# Altium PCB ESP32SSMB V1.2 .PcbDoc (part 1 of 2)
Units mm, origin at the board's own origin, x right, y up, seen from the top; angles counter-clockwise.
Board outline 38.38 x 27.81 mm, 2 copper layers (Top Layer, Bottom Layer), stack 1.571 mm thick; 72 components, 61 nets, 251 pads, 45 vias.
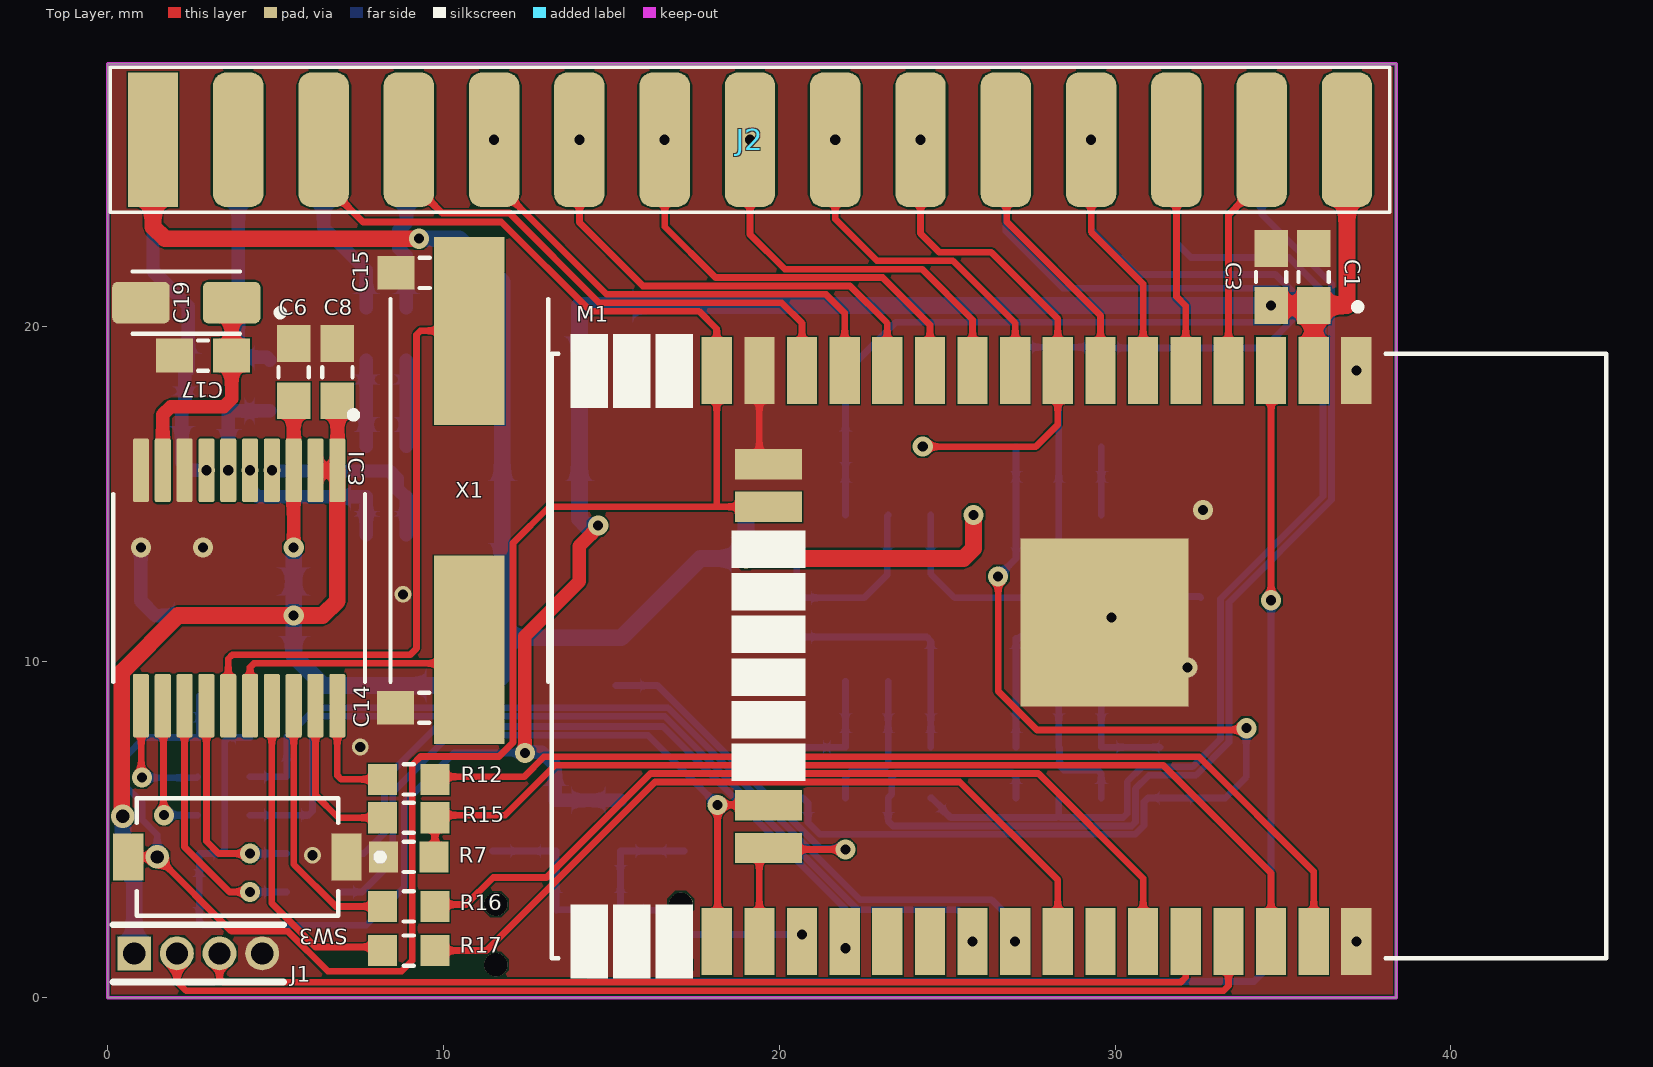
[diagram p0: Top Layer view]
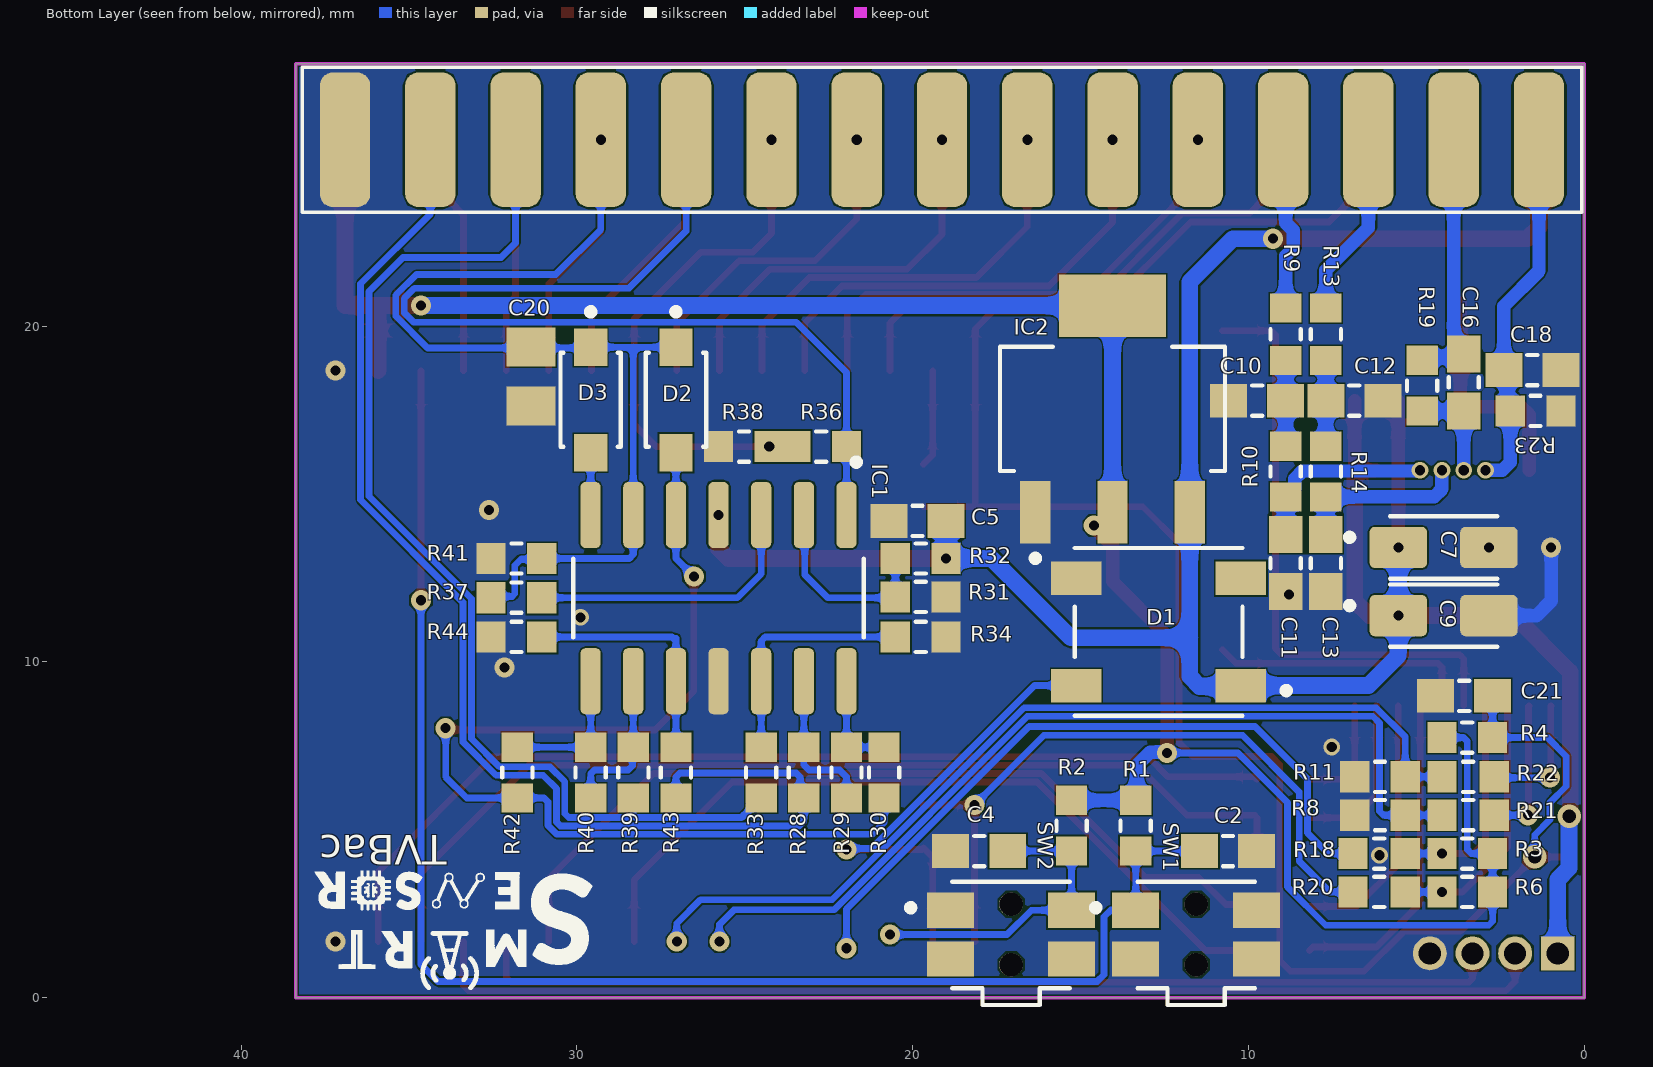
[diagram p1: Bottom Layer view, seen from below]
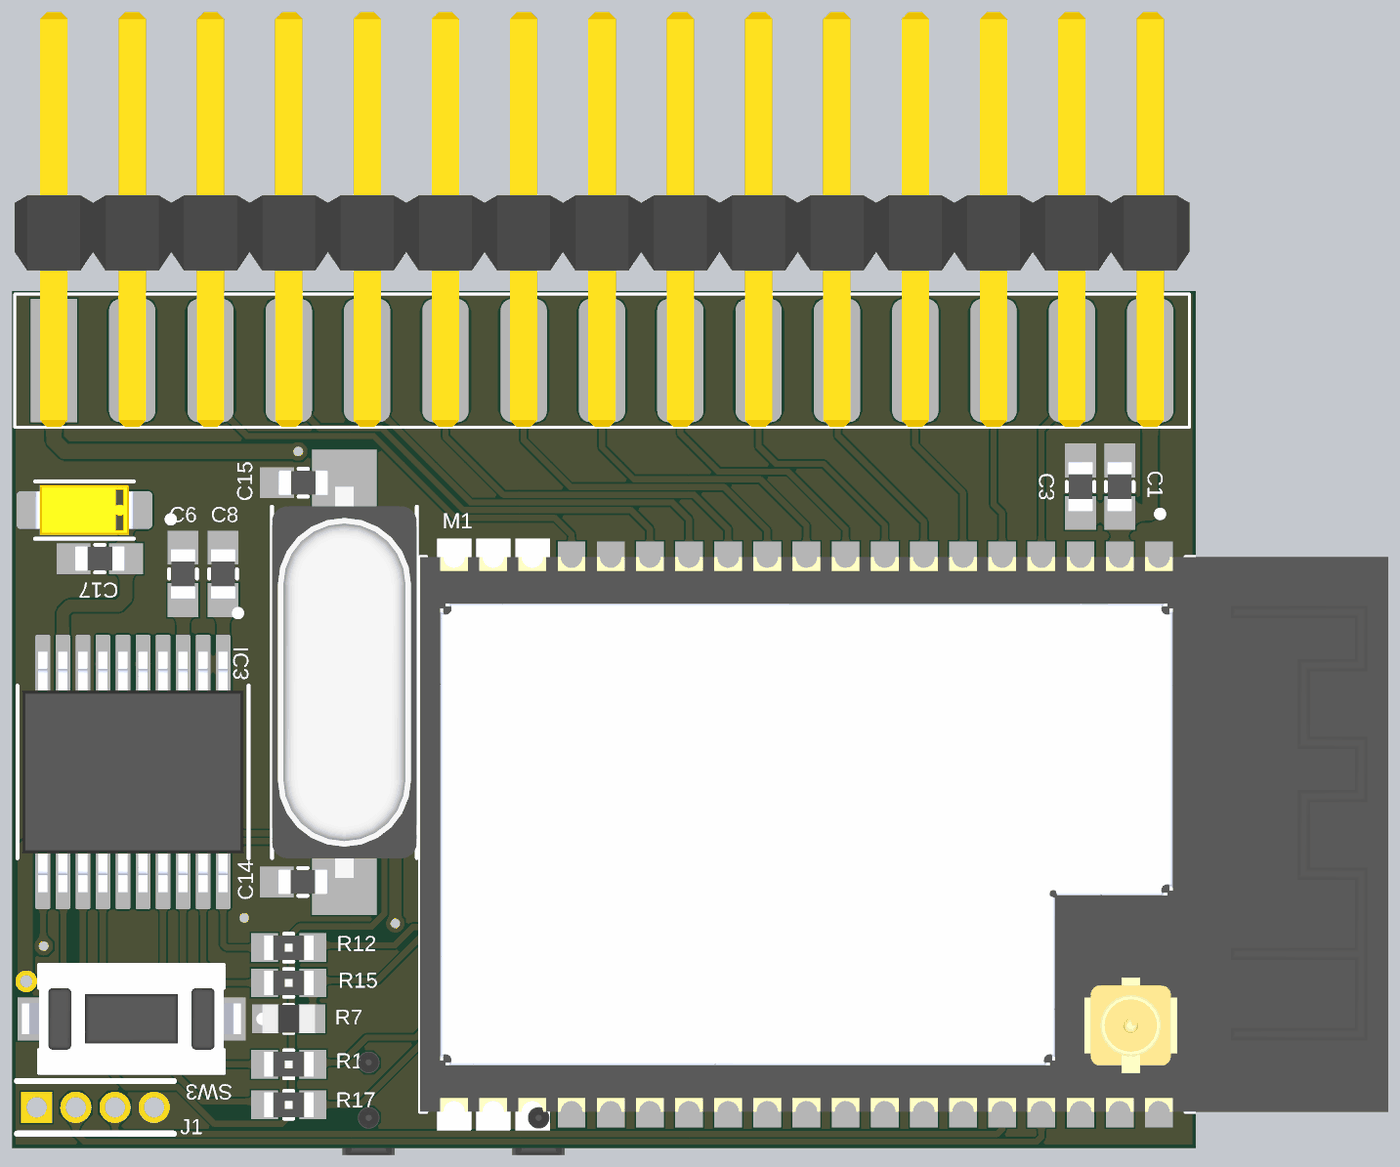
[diagram p2: 3D render of the assembled board from above, using the file's embedded part models]
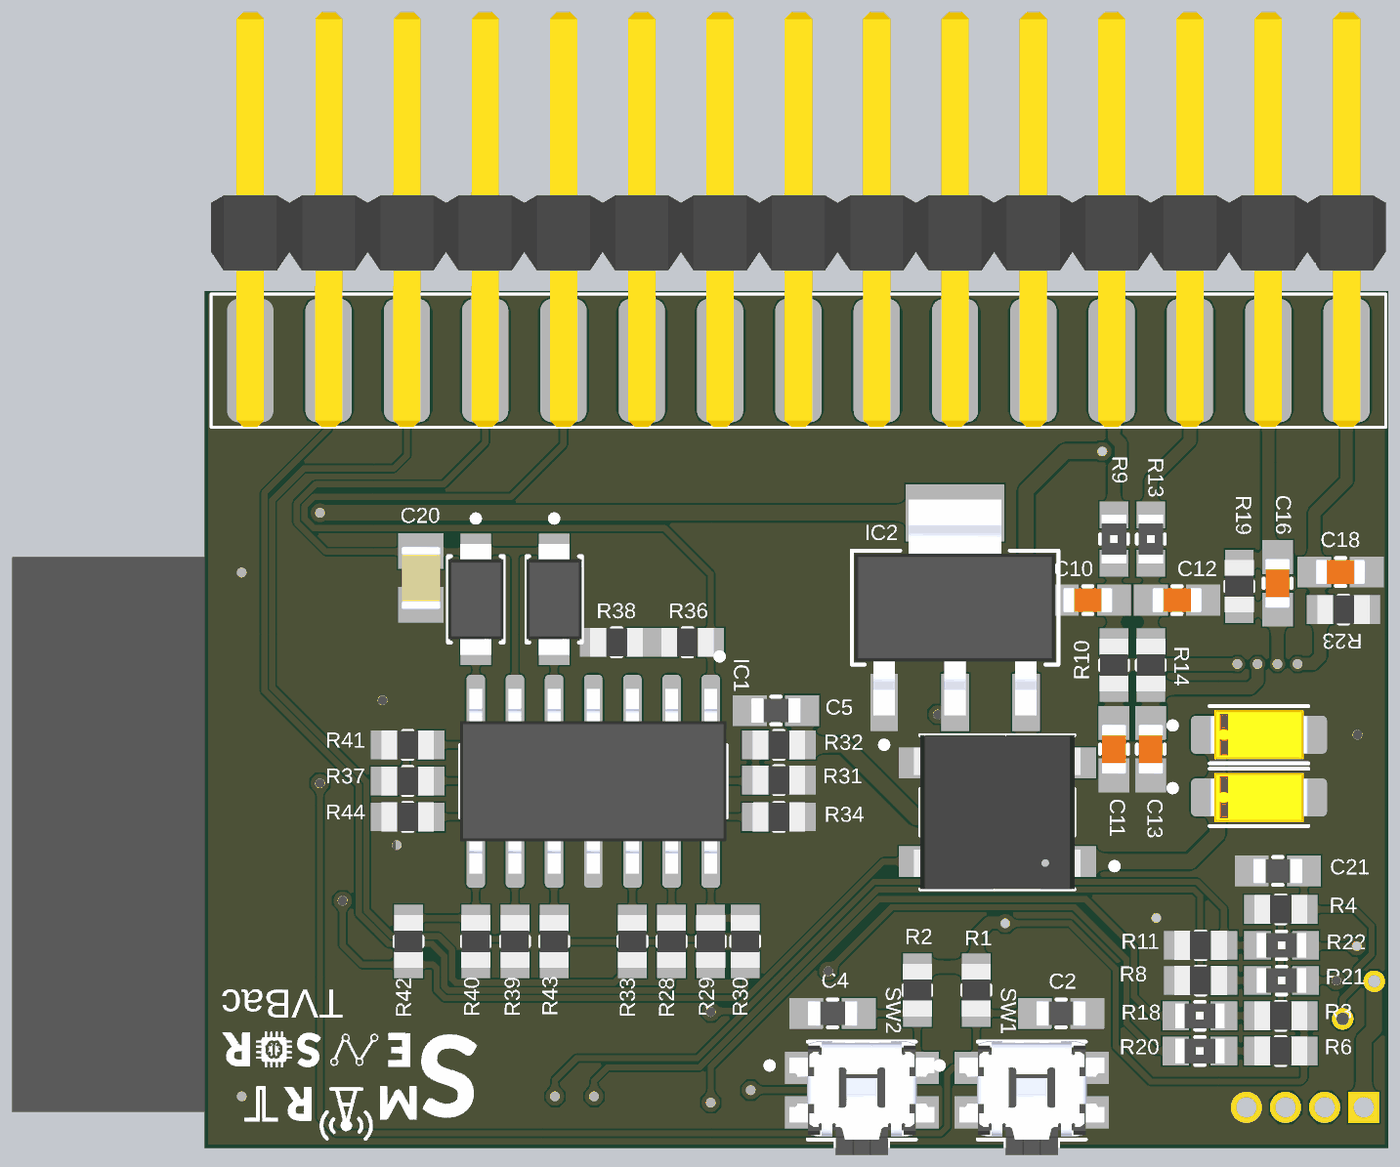
[diagram p3: 3D render of the assembled board from below, using the file's embedded part models]

## Layer stack, top to bottom
Top Solder: solder mask 0.0102, Solder Resist, Dk 3.5
Top Layer: signal copper 0.0356
Dielectric 1: dielectric 1.5, FR-4, Dk 4.8
Bottom Layer: signal copper 0.0356
Bottom Solder: solder mask 0.0102, Solder Resist, Dk 3.5

## Board outline
0,0 0,27.813 38.379,27.813 38.379,0

## Design rules (kind name [scope] priority, off if disabled: settings)
Clearance [All] p1: gap=0.05 ignorepadtopadclearanceinfootprint=FALSE
ComponentClearance [All] p1: gap=0.1 collisioncheckmode=3 verticalgap=0.1 showdistances=FALSE
DiffPairsRouting [All] p1: maxlimit=2 minlimit=0.1 mostfreqgap=0.2 toplayer_minwidth=0.15 toplayer_maxwidth=2 toplayer_prefwidth=0.2 bottomlayer_minwidth=0.15 bottomlayer_maxwidth=2 bottomlayer_prefwidth=0.2 maxuncoupledlength=12.7
HoleToHoleClearance [All] p1: gap=0.05 allowstackedmicrovias=TRUE
MinimumSolderMaskSliver [All] p1: minsoldermaskwidth=0.05
PlaneClearance [All] p1: clearance=0.1
PlaneConnect [All] p1: planeconnectstyle=Direct reliefexpansion=0.508 reliefentries=4 reliefconductorwidth=0.254 reliefairgap=0.254
PolygonConnect [All] p1: connectstyle=Direct reliefconductorwidth=0.254 reliefentries=4 polygonreliefangle="90 Angle" airgapwidth=0.254
RoutingCorners [All] p1: cornerstyle=45-Degree minsetback=1 maxsetback=2
RoutingVias [All] p1: holewidth=0.4 width=0.7 viastyle="Through Hole" minholewidth=0.3 minwidth=0.5 maxholewidth=0.7 maxwidth=1.2
SilkToSilkClearance [All] p1: silktosilkclearance=0.05
SilkToSolderMaskClearance [IsPad] p1: minsilkscreentomaskgap=0.05 clearancetoexposedcopper=TRUE
SolderMaskExpansion [All] p1: expansion=0 istentingtop=FALSE
Width [All] p1: maxlimit=2 minlimit=0.2 preferedwidth=0.2
21 further rules are at their usual default settings.

## Components (designator, comment, footprint, x,y, rotation, side; value= is the part's Value field where it differs from the comment)
C1 "0.1 µF ±10% 10V Ceramic Capacitor X7R 0603 (1608 Metric)" SMD-CAP-0603-YAGEO 35.916,21.463 r270 top value=0.01uF
C2 "10000 pF ±10% 16V Ceramic Capacitor X7R 0603 (1608 Metric)" SMD-CAP-0603-YAGEO 10.607,4.369 r0 bottom value=0.01uF
C3 "1 µF ±10% 16V Ceramic Capacitor X7R 0603 (1608 Metric)" SMD-CAP-0603-YAGEO 34.646,21.463 r270 top value=1uF
C4 "10000 pF ±10% 16V Ceramic Capacitor X7R 0603 (1608 Metric)" SMD-CAP-0603-YAGEO 18.019,4.369 r180 bottom value=0.01uF
C5 "0.1 µF ±10% 10V Ceramic Capacitor X7R 0603 (1608 Metric)" SMD-CAP-0603-YAGEO 19.856,14.199 r180 bottom value=0.01uF
C6 "0.1 µF ±10% 16V Ceramic Capacitor X7R 0603 (1608 Metric)" SMD-CAP-0603-YAGEO 5.537,18.63 r270 top value=0.1uF
C7 "10 µF Molded Tantalum Capacitors 10 V 1206 (3216 Metric) 3.8Ohm" SMD-CAP-TAN-1206-KEMET 4.187,13.411 r180 bottom
C8 "0.1 µF ±10% 16V Ceramic Capacitor X7R 0603 (1608 Metric)" SMD-CAP-0603-YAGEO 6.837,18.63 r270 top value=0.1uF
C9 "10 µF Molded Tantalum Capacitors 10 V 1206 (3216 Metric) 3.8Ohm" SMD-CAP-TAN-1206-KEMET 4.187,11.379 r180 bottom
C10 "0.033 µF ±5% 16V Ceramic Capacitor X7R 0603 (1608 Metric)" SMD-CAP-0603-KEMET 9.74,17.78 r180 bottom value=33nF
C11 "0.033 µF ±5% 16V Ceramic Capacitor X7R 0603 (1608 Metric)" SMD-CAP-0603-KEMET 8.89,12.942 r90 bottom value=33nF
C12 "0.033 µF ±5% 16V Ceramic Capacitor X7R 0603 (1608 Metric)" SMD-CAP-0603-KEMET 6.846,17.78 r0 bottom value=33nF
C13 "0.033 µF ±5% 16V Ceramic Capacitor X7R 0603 (1608 Metric)" SMD-CAP-0603-KEMET 7.696,12.942 r90 bottom value=33nF
C14 "22 pF ±1% 50V Ceramic Capacitor C0G, NP0 0603 (1608 Metric)" SMD-CAP-0603-YAGEO 9.423,8.636 r0 top value=22pF
C15 "22 pF ±1% 50V Ceramic Capacitor C0G, NP0 0603 (1608 Metric)" SMD-CAP-0603-YAGEO 9.435,21.59 r180 top value=22pF
C16 "0.033 µF ±5% 16V Ceramic Capacitor X7R 0603 (1608 Metric)" SMD-CAP-0603-KEMET 3.587,18.325 r270 bottom value=33nF
C17 "0.1 µF ±10% 16V Ceramic Capacitor X7R 0603 (1608 Metric)" SMD-CAP-0603-YAGEO 2.837,19.126 r0 top value=0.1uF
C18 "0.033 µF ±5% 16V Ceramic Capacitor X7R 0603 (1608 Metric)" SMD-CAP-0603-KEMET 1.543,18.694 r0 bottom value=33nF
C19 "10 µF Molded Tantalum Capacitors 10 V 1206 (3216 Metric) 3.8Ohm" SMD-CAP-TAN-1206-KEMET 2.337,20.701 r180 top
C20 "10 µF ±10% 6.3V Ceramic Capacitor X5R 0805 (2012 Metric)" SMD-CAP-0805-KEMET 31.369,18.5 r90 bottom value=10uF
C21 "10000 pF ±10% 16V Ceramic Capacitor X7R 0603 (1608 Metric)" SMD-CAP-0603-YAGEO 3.577,8.992 r180 bottom value=0.01uF
D1 "Addressable Lighting - LED Serial NRZ (Shift Register) Red, Green, Blue (RGB) 5.00mm L x 5.00mm W" SMD-LxW-5.0x5.0-WS2812-4PIN 12.675,10.897 r0 bottom
D2 "Diode 1000 V 1A Surface Mount SOD-123FL" SOD-123FL-SMCDS 27.051,17.805 r270 bottom value=6pF
D3 "Diode 1000 V 1A Surface Mount SOD-123FL" SOD-123FL-SMCDS 29.591,17.805 r270 bottom value=6pF
IC1 "General Purpose Amplifier 4 Circuit 14-SOIC" SOIC-14 25.781,11.901 r270 bottom
IC2 "Linear Voltage Regulator IC Positive Fixed 1 Output 1A SOT-223-3" SOT-223-3-DI 14.046,17.538 r90 bottom
IC3 "Single Phase Meter IC 20-SSOP" SSOP-20-ADI 3.912,12.203 r270 top
J1 "Connector Header Through Hole 4 position 0.050\" (1.27mm)" "HEADER-1.27-4 - U3D" 2.692,1.321 r0 top
J2 "HEADER; 15x2PIN; 2.54; HOR;" HEADER-2.54-15x2-HOR 19.126,25.552 r0 top
M1 "Bluetooth, WiFi 802.11b/g/n, Bluetooth v4.2 +EDR, Class 1, 2 and 3 Transceiver Module 2.4GHz ~ 2.5GHz Integrated, Trace Surface Mount" "MODULE-ESP32-WROVER - WROOM" 37.186,18.676 r270 top
R1 "10 kOhms ±1% 0.25W, 1/4W Chip Resistor 0603 (1608 Metric) Automotive AEC-Q200, Pulse Withstanding Thick Film" SMD-RES-0603-SEI 13.357,5.124 r90 bottom value=10k
R2 "10 kOhms ±1% 0.25W, 1/4W Chip Resistor 0603 (1608 Metric) Automotive AEC-Q200, Pulse Withstanding Thick Film" SMD-RES-0603-SEI 15.269,5.124 r90 bottom value=10k
R3 "10 kOhms ±1% 0.25W, 1/4W Chip Resistor 0603 (1608 Metric) Automotive AEC-Q200, Pulse Withstanding Thick Film" SMD-RES-0603-SEI 3.482,4.293 r0 bottom value=10k
R4 "10 kOhms ±1% 0.25W, 1/4W Chip Resistor 0603 (1608 Metric) Automotive AEC-Q200, Pulse Withstanding Thick Film" SMD-RES-0603-SEI 3.482,7.747 r0 bottom value=10k
R6 "10 kOhms ±1% 0.25W, 1/4W Chip Resistor 0603 (1608 Metric) Automotive AEC-Q200, Pulse Withstanding Thick Film" SMD-RES-0603-SEI 3.482,3.15 r0 bottom value=10k
R7 "10 kOhms ±1% 0.25W, 1/4W Chip Resistor 0603 (1608 Metric) Automotive AEC-Q200, Pulse Withstanding Thick Film" SMD-RES-0603-SEI 8.963,4.191 r0 top value=10k
R8 "10 kOhms ±1% 0.25W, 1/4W Chip Resistor 0603 (1608 Metric) Automotive AEC-Q200, Pulse Withstanding Thick Film" SMD-RES-0603-SEI 6.082,5.436 r180 bottom value=10k
R9 "100 Ohms ±1% 0.1W, 1/10W Chip Resistor 0603 (1608 Metric) Automotive AEC-Q200, High Voltage Thick Film" SMD-RES-0603-RS 8.89,19.761 r270 bottom value=100R
R10 "1 kOhms ±1% 0.25W, 1/4W Chip Resistor 0603 (1608 Metric) Automotive AEC-Q200, Pulse Withstanding Thick Film" SMD-RES-0603-SEI 8.89,15.672 r270 bottom value=1K
R11 "10 kOhms ±1% 0.25W, 1/4W Chip Resistor 0603 (1608 Metric) Automotive AEC-Q200, Pulse Withstanding Thick Film" SMD-RES-0603-SEI 6.082,6.579 r180 bottom value=10k
R12 "100 Ohms ±1% 0.1W, 1/10W Chip Resistor 0603 (1608 Metric) Automotive AEC-Q200, High Voltage Thick Film" SMD-RES-0603-RS 8.963,6.502 r0 top value=100R
R13 "100 Ohms ±1% 0.1W, 1/10W Chip Resistor 0603 (1608 Metric) Automotive AEC-Q200, High Voltage Thick Film" SMD-RES-0603-RS 7.696,19.761 r270 bottom value=100R
R14 "1 kOhms ±1% 0.25W, 1/4W Chip Resistor 0603 (1608 Metric) Automotive AEC-Q200, Pulse Withstanding Thick Film" SMD-RES-0603-SEI 7.696,15.672 r270 bottom value=1K
R15 "4.7 kOhms ±1% 0.1W, 1/10W Chip Resistor 0603 (1608 Metric) Anti-Sulfur Thick Film" SMD-RES-0603-RS 8.963,5.359 r0 top value=4.7K
R16 "100 Ohms ±1% 0.1W, 1/10W Chip Resistor 0603 (1608 Metric) Automotive AEC-Q200, High Voltage Thick Film" SMD-RES-0603-RS 8.963,2.718 r0 top value=100R
R17 "100 Ohms ±1% 0.1W, 1/10W Chip Resistor 0603 (1608 Metric) Automotive AEC-Q200, High Voltage Thick Film" SMD-RES-0603-RS 8.963,1.403 r0 top value=100R
R18 "100 Ohms ±1% 0.1W, 1/10W Chip Resistor 0603 (1608 Metric) Automotive AEC-Q200, High Voltage Thick Film" SMD-RES-0603-RS 6.107,4.293 r0 bottom value=100R
R19 "1 kOhms ±1% 0.25W, 1/4W Chip Resistor 0603 (1608 Metric) Automotive AEC-Q200, Pulse Withstanding Thick Film" SMD-RES-0603-SEI 4.826,18.23 r270 bottom value=1K
R20 "100 Ohms ±1% 0.1W, 1/10W Chip Resistor 0603 (1608 Metric) Automotive AEC-Q200, High Voltage Thick Film" SMD-RES-0603-RS 6.107,3.15 r0 bottom value=100R
R21 "4.7 kOhms ±1% 0.1W, 1/10W Chip Resistor 0603 (1608 Metric) Anti-Sulfur Thick Film" SMD-RES-0603-RS 3.457,5.436 r0 bottom value=4.7K
R22 "4.7 kOhms ±1% 0.1W, 1/10W Chip Resistor 0603 (1608 Metric) Anti-Sulfur Thick Film" SMD-RES-0603-RS 3.457,6.579 r0 bottom value=4.7K
R23 "1 kOhms ±1% 0.25W, 1/4W Chip Resistor 0603 (1608 Metric) Automotive AEC-Q200, Pulse Withstanding Thick Film" SMD-RES-0603-SEI 1.448,17.475 r0 bottom value=1K
R28 "1 kOhms ±1% 0.25W, 1/4W Chip Resistor 0603 (1608 Metric) Automotive AEC-Q200, Pulse Withstanding Thick Film" SMD-RES-0603-SEI 23.241,6.706 r90 bottom value=1K
R29 "100 kOhms ±5% 0.25W, 1/4W Chip Resistor 0603 (1608 Metric) Automotive AEC-Q200, Pulse Withstanding Thick Film" SMD-RES-0603-SEI 21.971,6.706 r90 bottom value=100K
R30 "1 kOhms ±1% 0.25W, 1/4W Chip Resistor 0603 (1608 Metric) Automotive AEC-Q200, Pulse Withstanding Thick Film" SMD-RES-0603-SEI 20.853,6.706 r270 bottom value=1K
R31 "1 kOhms ±1% 0.25W, 1/4W Chip Resistor 0603 (1608 Metric) Automotive AEC-Q200, Pulse Withstanding Thick Film" SMD-RES-0603-SEI 19.761,11.938 r0 bottom value=1K
R32 "10 kOhms ±1% 0.25W, 1/4W Chip Resistor 0603 (1608 Metric) Automotive AEC-Q200, Pulse Withstanding Thick Film" SMD-RES-0603-SEI 19.761,13.081 r180 bottom value=10k
R33 "1 kOhms ±1% 0.25W, 1/4W Chip Resistor 0603 (1608 Metric) Automotive AEC-Q200, Pulse Withstanding Thick Film" SMD-RES-0603-SEI 24.511,6.706 r90 bottom value=1K
R34 "100 kOhms ±5% 0.25W, 1/4W Chip Resistor 0603 (1608 Metric) Automotive AEC-Q200, Pulse Withstanding Thick Film" SMD-RES-0603-SEI 19.761,10.744 r180 bottom value=100K
R36 "1 kOhms ±1% 0.25W, 1/4W Chip Resistor 0603 (1608 Metric) Automotive AEC-Q200, Pulse Withstanding Thick Film" SMD-RES-0603-SEI 22.726,16.413 r0 bottom value=1K
R37 "1 kOhms ±1% 0.25W, 1/4W Chip Resistor 0603 (1608 Metric) Automotive AEC-Q200, Pulse Withstanding Thick Film" SMD-RES-0603-SEI 31.801,11.913 r180 bottom value=1K
R38 "1 kOhms ±1% 0.25W, 1/4W Chip Resistor 0603 (1608 Metric) Automotive AEC-Q200, Pulse Withstanding Thick Film" SMD-RES-0603-SEI 25.026,16.413 r180 bottom value=1K
R39 "1 kOhms ±1% 0.25W, 1/4W Chip Resistor 0603 (1608 Metric) Automotive AEC-Q200, Pulse Withstanding Thick Film" SMD-RES-0603-SEI 28.321,6.706 r90 bottom value=1K
R40 "100 kOhms ±5% 0.25W, 1/4W Chip Resistor 0603 (1608 Metric) Automotive AEC-Q200, Pulse Withstanding Thick Film" SMD-RES-0603-SEI 29.591,6.706 r90 bottom value=100K
R41 "100 kOhms ±5% 0.25W, 1/4W Chip Resistor 0603 (1608 Metric) Automotive AEC-Q200, Pulse Withstanding Thick Film" SMD-RES-0603-SEI 31.801,13.081 r180 bottom value=100K
R42 "1 kOhms ±1% 0.25W, 1/4W Chip Resistor 0603 (1608 Metric) Automotive AEC-Q200, Pulse Withstanding Thick Film" SMD-RES-0603-SEI 31.775,6.706 r270 bottom value=1K
R43 "1 kOhms ±1% 0.25W, 1/4W Chip Resistor 0603 (1608 Metric) Automotive AEC-Q200, Pulse Withstanding Thick Film" SMD-RES-0603-SEI 27.051,6.706 r90 bottom value=1K
R44 "100 kOhms ±5% 0.25W, 1/4W Chip Resistor 0603 (1608 Metric) Automotive AEC-Q200, Pulse Withstanding Thick Film" SMD-RES-0603-SEI 31.801,10.744 r0 bottom value=100K
SW1 "https://www.digikey.com/en/products/detail/panasonic-electronic-components/EVQ-P7L01P/4429453" SW-HxLxW-1.1x3.5x2.9-PEC 11.557,1.88 r180 bottom
SW2 "https://www.digikey.com/en/products/detail/panasonic-electronic-components/EVQ-P7L01P/4429453" SW-HxLxW-1.1x3.5x2.9-PEC 17.069,1.88 r180 bottom
SW3 "Tactile Switch SPST-NO Top Actuated Surface Mount" SW-HXLXW-5.0X6.0X3.5-C&K 3.861,4.191 r180 top
X1 "3.579545 MHz ±20ppm Crystal 18pF 180 Ohms HC-49/US" SMD-HC-49/US-ALLC 10.77,15.113 r90 top value=3.58M

## Footprints (in the part's own frame and the unit in brackets; to place one, negate y for a bottom-side part, rotate by r counter-clockwise, add the part's x,y. Pads: shape width x height; smd on the part's side, far side on the other; paste and mask are expansions set on the pad)
"HEADER-1.27-4 - U3D" [mm]
  rect 1.01x1.01 hole 0.66: 01(-1.905,0)
  round 1.01 hole 0.66: 02(-0.635,0) 03(0.635,0) 04(1.905,0)
  silkscreen extent -2.54,-0.85 2.54,0.85
HEADER-2.54-15x2-HOR [mm]
  rect 1.5x4 smd: 01(-17.78,0)
  rrect50% 1.5x4 smd far side: 02(-17.78,0) 04(-15.24,0) 06(-12.7,0) 08(-10.16,0) 10(-7.62,0) 12(-5.08,0) 14(-2.54,0) 16(0,0) 18(2.54,0) 20(5.08,0) 22(7.62,0) 24(10.16,0) 26(12.7,0) 28(15.24,0) 30(17.78,0)
  rrect50% 1.5x4 smd: 03(-15.24,0) 05(-12.7,0) 07(-10.16,0) 09(-7.62,0) 11(-5.08,0) 13(-2.54,0) 15(0,0) 17(2.54,0) 19(5.08,0) 21(7.62,0) 23(10.16,0) 25(12.7,0) 27(15.24,0) 29(17.78,0)
  silkscreen extent -19.05,-2.16 19.05,2.16, body extent -19.05,-2.16 19.05,11.3, height 1.72
"MODULE-ESP32-WROVER - WROOM" [mm]
  rect 2x0.9 smd: 1(0,0) 2(0,-1.27) 3(0,-2.54) 4(0,-3.81) 5(0,-5.08) 6(0,-6.35) 7(0,-7.62) 8(0,-8.89) 9(0,-10.16) 10(0,-11.43) 11(0,-12.7) 12(0,-13.97) 13(0,-15.24) 14(0,-16.51) 15(0,-17.78) 16(0,-19.05) 23(17,-19.05) 24(17,-17.78) 25(17,-16.51) 26(17,-15.24) 27(17,-13.97) 28(17,-12.7) 29(17,-11.43) 30(17,-10.16) 31(17,-8.89) 32(17,-7.62) 33(17,-6.35) 34(17,-5.08) 35(17,-3.81) 36(17,-2.54) 37(17,-1.27) 38(17,0)
  rect 0.9x2 smd: 15(2.785,-17.51) 16(4.055,-17.51) 23(12.945,-17.51) 24(14.215,-17.51)
  rect 5x5 smd paste-1.835 mask-1.835: 39(7.5,-7.5)
  silkscreen extent -2,-23.96 18.1,7.44, body extent -0.5,-23.96 17.5,7.44, height 3.4
SMD-CAP-0603-KEMET [mm]
  rect 1.1x1 smd: 1(-0.85,0) 2(0.85,0)
  silkscreen extent -0.15,-0.45 0.15,0.45, body extent -0.8,-0.4 0.8,0.4, height 0.87
SMD-CAP-0603-YAGEO [mm]
  rect 1.1x1 smd: 1(-0.85,0) 2(0.85,0)
  silkscreen extent -0.15,-0.45 0.15,0.45, body extent -0.8,-0.4 0.8,0.4, height 0.9
SMD-CAP-0805-KEMET [mm]
  rect 1.16x1.47 smd: 1(-0.875,0) 2(0.875,0)
  body extent -1.02,-0.64 1.02,0.64, height 1.4
SMD-CAP-TAN-1206-KEMET [mm]
  rrect25% 1.71x1.23 smd: 1(-1.35,0) 2(1.35,0)
  silkscreen extent -2.9,-0.93 1.6,0.93, body extent -1.6,-0.8 1.6,0.8, height 1.8
SMD-HC-49/US-ALLC [mm]
  rect 5.6x2.1 smd: 1(-4.75,0) 2(4.75,0)
  silkscreen extent -5.7,-2.35 5.7,2.35, body extent -6.35,-2.35 6.35,2.35, height 4.06
SMD-LxW-5.0x5.0-WS2812-4PIN [mm]
  rect 1.5x1 smd: 1(-2.45,1.6) 2(-2.45,-1.6) 3(2.45,-1.6) 4(2.45,1.6)
  silkscreen extent -3.9,-2.5 2.5,2.5, body extent -2.71,-2.5 2.71,2.5, height 1.6
SMD-RES-0603-RS [mm]
  rect 0.87x0.93 smd: 1(-0.78,0) 2(0.78,0)
  silkscreen extent -0.15,-0.45 0.15,0.45, body extent -0.8,-0.4 0.8,0.4, height 0.55
SMD-RES-0603-SEI [mm]
  rect 0.87x0.93 smd: 1(-0.755,0) 2(0.755,0)
  silkscreen extent -0.15,-0.45 0.15,0.45, body extent -0.85,-0.47 0.85,0.47, height 0.56
SOD-123FL-SMCDS [mm]
  rect 1.12x0.99 smd: A(1.57,0) K(-1.57,0)
  silkscreen extent -2.72,-0.9 1.4,0.9, body extent -1.8,-0.9 1.8,0.9, height 1.1
SOIC-14 [mm]
  rrect50% 1.97x0.6 smd: 1(-2.475,3.81) 2(-2.475,2.54) 3(-2.475,1.27) 4(-2.475,0) 5(-2.475,-1.27) 6(-2.475,-2.54) 7(-2.475,-3.81) 8(2.475,-3.81) 9(2.475,-2.54) 10(2.475,-1.27) 11(2.475,0) 12(2.475,1.27) 13(2.475,2.54) 14(2.475,3.81)
  silkscreen extent -4.15,-4.33 1.17,4.33, body extent -3,-4.33 3,4.33, height 1.75
SOT-223-3-DI [mm]
  rect 1.86x0.9 smd: 1(-3.075,2.3) 2(-3.075,0) 3(-3.075,-2.3)
  rect 1.86x3.19 smd: 4(3.075,0)
  silkscreen extent -4.55,-3.35 1.85,3.35, body extent -3.5,-3.25 3.5,3.25, height 1.65
SSOP-20-ADI [mm]
  rrect25% 1.9x0.48 smd: 1(-3.505,2.925) 2(-3.505,2.275) 3(-3.505,1.625) 4(-3.505,0.975) 5(-3.505,0.325) 6(-3.505,-0.325) 7(-3.505,-0.975) 8(-3.505,-1.625) 9(-3.505,-2.275) 10(-3.505,-2.925) 11(3.505,-2.925) 12(3.505,-2.275) 13(3.505,-1.625) 14(3.505,-0.975) 15(3.505,-0.325) 16(3.505,0.325) 17(3.505,0.975) 18(3.505,1.625) 19(3.505,2.275) 20(3.505,2.925)
  silkscreen extent -5.25,-3.75 2.8,3.75, body extent -3.9,-3.6 3.9,3.6, height 2
SW-HxLxW-1.1x3.5x2.9-PEC [mm]
  rect 1.4x1.05 smd: 11(-1.8,0.725) 12(1.8,0.725) 21(-1.8,-0.725) 22(1.8,-0.725)
  round 0.7 hole 0.7 unplated: ""(0,-0.9) ""(0,0.9)
  silkscreen extent -3.09,-2.1 1.75,1.57, body extent -2.35,-2.1 2.35,1.59, height 1.5
SW-HXLXW-5.0X6.0X3.5-C&K [mm]
  rect 0.9x1.4 smd: 1(-3.25,0) 2(3.25,0)
  silkscreen extent -4.35,-1.75 3,1.75, body extent -3.55,-1.75 3.55,1.75, height 4.3

## Part data
C1 C5: library part "CAP; 0.1uF; 10V; 0603; SMD; CC0603KRX7R6BB104", "Multilayer Ceramic Capacitor, 0.1 uF, 10 V, ± 10%, X7R, 0603 [1608 Metric]", Manufacturer=Yageo, Manufacturer Part Number=CC0603KRX7R6BB104, Supplier Part Number=311-4055-1-ND, Category="Ceramic Capacitors", ComponentLink1Description=https://datasheet.ciiva.com/11586/upy-gphc-x7r-6-3v-to-50v-8-11586327.pdf?src-supplier=Avnet, ComponentLink1URL=https://datasheet.ciiva.com/11586/upy-gphc-x7r-6-3v-to-50v-8-11586327.pdf?src-supplier=Avnet, ComponentLink2Description="Link Digikey", ComponentLink2URL=https://www.digikey.com/en/products/detail/yageo/CC0603KRX7R6BB104/5883741, Designer=TVBac, Halogen Free=5694HalogenFree, Lead Free=5697LeadFree, Material=4241ConductorMaterial, Pricing="1=0.1, 10=0.067, 50=0.0398, 100=0.0314, 500=0.02316, 1000=0.01918, 4000=0.01633, 8000=0.01519, 12000=0.01443, 28000=0.01367, 100000=0.01035, 200000=0.0101, 400000=0.00949 (USD)", RoHS=Yes, Stock=113177, Supplier=Digikey
C2 C4 C21: library part "CAP; 0.01uF; 16V; 0603; SMD; CC0603KRX7R7BB103", "Multilayer Ceramic Capacitor, 0.01 uF, 16 V, ± 10%, X7R, 0603 [1608 Metric]", Manufacturer=Yageo, Manufacturer Part Number=CC0603KRX7R7BB103, Package=0603, Supplier Part Number=311-3369-1-ND, Category="Ceramic Capacitors", ComponentLink1Description=https://datasheet.ciiva.com/7978/1489800-7978139.pdf?src-supplier=Element14, ComponentLink1URL=https://datasheet.ciiva.com/7978/1489800-7978139.pdf?src-supplier=Element14, ComponentLink2Description="Link Digikey", ComponentLink2URL=https://www.digikey.com/en/products/detail/yageo/CC0603KRX7R7BB103/5883753, Designer=TVBac, Lead Free=5697LeadFree, Material=4241ConductorMaterial, Pricing="1=0.1, 10=0.041, 50=0.0236, 100=0.0183, 500=0.01378, 1000=0.01083 (USD)", RoHS=Yes, Stock=24661, Supplier=Digikey
C3: library part "CAP; 1uF; 16V; 0603; SMD; CC0603KRX7R7BB105", "0603 1 uF 16 V ±10 % Tolerance X7R SMT Multilayer Ceramic Capacitor", Case Code (Imperial)=0603, Case Code (Metric)=1608, Dielectric=X7R, Manufacturer=Yageo, Manufacturer Part Number=CC0603KRX7R7BB105, Max Operating Temperature=125°C, Min Operating Temperature=-55°C, Package Quantity=1, Supplier Part Number=311-1446-1-ND, Tolerance=10%, Voltage=16V, Case/Package=0603, Category="Ceramic Capacitors", ComponentLink1Description=https://datasheet.ciiva.com/8033/1734573-8033801.pdf?src-supplier=Element14, ComponentLink1URL=https://datasheet.ciiva.com/8033/1734573-8033801.pdf?src-supplier=Element14, ComponentLink2Description=https://datasheet.ciiva.com/8033/1734573-8033800.pdf?src-supplier=Element14, ComponentLink2URL=https://datasheet.ciiva.com/8033/1734573-8033800.pdf?src-supplier=Element14, ComponentLink3Description=https://datasheet.ciiva.com/7978/1489800-7978143.pdf?src-supplier=Element14, ComponentLink3URL=https://datasheet.ciiva.com/7978/1489800-7978143.pdf?src-supplier=Element14, ComponentLink4Description=https://datasheet.ciiva.com/28450/1489800-28450557.pdf?src-supplier=Element14, ComponentLink4URL=https://datasheet.ciiva.com/28450/1489800-28450557.pdf?src-supplier=Element14, ComponentLink5Description=https://datasheet.ciiva.com/176/mlccorderingcode-176789.pdf?src-supplier=Digikey, ComponentLink5URL=https://datasheet.ciiva.com/176/mlccorderingcode-176789.pdf?src-supplier=Digikey, ComponentLink6Description=https://datasheet.ciiva.com/176/mlccorderingcode-176788.pdf?src-supplier=Digikey, ComponentLink6URL=https://datasheet.ciiva.com/176/mlccorderingcode-176788.pdf?src-supplier=Digikey, ComponentLink7Description=https://datasheet.ciiva.com/176/mlccorderingcode-176790.pdf?src-supplier=Digikey, ComponentLink7URL=https://datasheet.ciiva.com/176/mlccorderingcode-176790.pdf?src-supplier=Digikey, ComponentLink8Description=https://datasheet.ciiva.com/5425/upy-gphc-x7r-6-3v-to-50v-8-12304-5425495.pdf?src-supplier=Mouser, ComponentLink8URL=https://datasheet.ciiva.com/5425/upy-gphc-x7r-6-3v-to-50v-8-12304-5425495.pdf?src-supplier=Mouser, ComponentLink9Description="Link Digikey", ComponentLink9URL=https://www.digikey.com/en/products/detail/yageo/CC0603KRX7R7BB105/2833611?s=N4IgTCBcDaIMJwAwDZEGYDSAlAGgdizwCEiBGRAVhAF0BfIA, Construction=Flat, Depth=0.8mm, Designer=TVBac, Dissipation Factor=5%, Halogen Free=5694HalogenFree, Height=0.8mm, Lead Free=5697LeadFree, Length=1.6mm, Material=4241ConductorMaterial, Mounting Technology="Surface Mount", Packaging="Tape and Reel", Pins=2, Pricing="1=0.1, 10=0.066, 50=0.0392, 100=0.0308, 500=0.02274, 1000=0.01882, 4000=0.01785, 8000=0.01626, 12000=0.01545, 20000=0.01456, 28000=0.01404, 40000=0.01353, 100000=0.01313 (USD)", Radiation Hardening=No, Reach SVHC Compliant=Unknown, RoHS=Yes, RoHS Compliant=Yes, Series=CC, Stock=9165861, Supplier=Digikey, Termination=SMD/SMT, Thickness=0.035inch, Voltage Rating=16V, Voltage Rating (DC)=16V, Width=0.031inch
C6 C8 C17: library part "CAP; 0.1uF; 16V; 0603; SMD; CC0603KRX7R7BB104", "0603 0.1 uF 16 V ±10 % Tolerance X7R SMT Multilayer Ceramic Capacitor", Case Code (Imperial)=0603, Case Code (Metric)=1608, Dielectric=X7R, Insulation Resistance=100GR, Manufacturer=Yageo, Manufacturer Part Number=CC0603KRX7R7BB104, Max Operating Temperature=125°C, Min Operating Temperature=-55°C, Package Quantity=1, Supplier Part Number=311-1088-1-ND, Tolerance=10%, Voltage=16V, Case/Package=0603, Category="Ceramic Capacitors", ComponentLink1Description=https://datasheet.ciiva.com/11786/0900766b80d84f1d-11786077.pdf?src-supplier=Rs, ComponentLink1URL=https://datasheet.ciiva.com/11786/0900766b80d84f1d-11786077.pdf?src-supplier=Rs, ComponentLink2Description=https://datasheet.ciiva.com/8033/70765-8033799.pdf?src-supplier=Element14, ComponentLink2URL=https://datasheet.ciiva.com/8033/70765-8033799.pdf?src-supplier=Element14, ComponentLink3Description=https://datasheet.ciiva.com/7978/1489800-7978141.pdf?src-supplier=Element14, ComponentLink3URL=https://datasheet.ciiva.com/7978/1489800-7978141.pdf?src-supplier=Element14, ComponentLink4Description=https://datasheet.ciiva.com/28450/1489800-28450552.pdf?src-supplier=Element14, ComponentLink4URL=https://datasheet.ciiva.com/28450/1489800-28450552.pdf?src-supplier=Element14, ComponentLink5Description=https://datasheet.ciiva.com/46430/1734573-46430156.pdf?src-supplier=Element14, ComponentLink5URL=https://datasheet.ciiva.com/46430/1734573-46430156.pdf?src-supplier=Element14, ComponentLink6Description=https://datasheet.ciiva.com/144/mlccorderingcode-144183.pdf?src-supplier=Digikey, ComponentLink6URL=https://datasheet.ciiva.com/144/mlccorderingcode-144183.pdf?src-supplier=Digikey, ComponentLink7Description=https://datasheet.ciiva.com/144/mlccorderingcode-144182.pdf?src-supplier=Digikey, ComponentLink7URL=https://datasheet.ciiva.com/144/mlccorderingcode-144182.pdf?src-supplier=Digikey, ComponentLink8Description=https://datasheet.ciiva.com/144/mlccorderingcode-144184.pdf?src-supplier=Digikey, ComponentLink8URL=https://datasheet.ciiva.com/144/mlccorderingcode-144184.pdf?src-supplier=Digikey, ComponentLink9Description=https://datasheet.ciiva.com/8033/1734573-8033797.pdf?src-supplier=Element14, ComponentLink9URL=https://datasheet.ciiva.com/8033/1734573-8033797.pdf?src-supplier=Element14, ComponentLink10Description=https://datasheet.ciiva.com/13395/upy-gphc-x7r-6-3v-to-50v-8-13395674.pdf?src-supplier=Mouser, ComponentLink10URL=https://datasheet.ciiva.com/13395/upy-gphc-x7r-6-3v-to-50v-8-13395674.pdf?src-supplier=Mouser, ComponentLink11Description=https://datasheet.ciiva.com/11464/upy-gphc-x7r-6-3v-to-50v-8-11464735.pdf?src-supplier=Avnet, ComponentLink11URL=https://datasheet.ciiva.com/11464/upy-gphc-x7r-6-3v-to-50v-8-11464735.pdf?src-supplier=Avnet, ComponentLink12Description=https://datasheet.ciiva.com/15165/getdatasheetpartid-63554-15165387.pdf?src-supplier=Verical, ComponentLink12URL=https://datasheet.ciiva.com/15165/getdatasheetpartid-63554-15165387.pdf?src-supplier=Verical, ComponentLink13Description="Link Digikey", ComponentLink13URL=https://www.digikey.com/en/products/detail/yageo/CC0603KRX7R7BB104/302822, Depth=0.8mm, Designer=TVBac, Halogen Free="Halogen Free", Height=0.8mm, Lead Free="Lead Free", Length=1.6mm, Material=Ceramic, Mounting Technology="Surface Mount", Packaging="Tape and Reel", Pins=2, Pricing="1=0.1, 10=0.042, 50=0.0238, 100=0.0185, 500=0.01392, 1000=0.01094, 4000=0.00915, 8000=0.00836, 12000=0.00796, 28000=0.00756, 100000=0.00547, 200000=0.00529, 400000=0.00497 (USD)", Radiation Hardening=No, Reach SVHC Compliant=No, RoHS=Yes, RoHS Compliant=Yes, Series=CC, Stock=8705780, Supplier=Digikey, Termination=SMD/SMT, Thickness=0.035inch, Voltage Rating=16V, Voltage Rating (DC)=16V, Width=0.031inch
C7 C9 C19: library part "CAP; CAP_TAN; 10uF; 10V; T491A106M010AT", "Capacitor, Tantalum, Solid, Polarized, 10 V, 10 Uf, Surface Mount, 1206, Lead Free", Case Code (Imperial)=1206, Case Code (Metric)=3216, Dielectric Material=Tantalum, ESR (Equivalent Series Resistance)=4R, Leakage Current=1uA, Manufacturer=KEMET, Manufacturer Part Number=T491A106M010AT, Max Operating Temperature=125°C, Min Operating Temperature=-55°C, Ripple Current=137mA, Supplier Part Number=80-T491A106M010, Tolerance=20%, Voltage=10V, Case/Package=1206, Category="Tantalum Capacitors", ComponentLink1Description=https://datasheet.ciiva.com/27052/1573273-27052561.pdf?src-supplier=Jameco, ComponentLink1URL=https://datasheet.ciiva.com/27052/1573273-27052561.pdf?src-supplier=Jameco, ComponentLink2Description=https://datasheet.ciiva.com/257/kem-t2005-t491-257587.pdf?src-supplier=Digikey, ComponentLink2URL=https://datasheet.ciiva.com/257/kem-t2005-t491-257587.pdf?src-supplier=Digikey, ComponentLink3Description=https://datasheet.ciiva.com/7668/kem-t2005-t491-7668140.pdf?src-supplier=Element14, ComponentLink3URL=https://datasheet.ciiva.com/7668/kem-t2005-t491-7668140.pdf?src-supplier=Element14, ComponentLink4Description=https://datasheet.ciiva.com/257/kem-t2005-t491-257588.pdf?src-supplier=Digikey, ComponentLink4URL=https://datasheet.ciiva.com/257/kem-t2005-t491-257588.pdf?src-supplier=Digikey, ComponentLink5Description=https://datasheet.ciiva.com/257/kem-t2005-t491-257589.pdf?src-supplier=Digikey, ComponentLink5URL=https://datasheet.ciiva.com/257/kem-t2005-t491-257589.pdf?src-supplier=Digikey, ComponentLink6Description=https://datasheet.ciiva.com/14601/70095774-14601994.pdf?src-supplier=Allied+Electronics, ComponentLink6URL=https://datasheet.ciiva.com/14601/70095774-14601994.pdf?src-supplier=Allied+Electronics, ComponentLink7Description=https://datasheet.ciiva.com/14602/70095774-14602172.pdf?src-supplier=Allied+Electronics, ComponentLink7URL=https://datasheet.ciiva.com/14602/70095774-14602172.pdf?src-supplier=Allied+Electronics, ComponentLink8Description=https://datasheet.ciiva.com/12910/kem-t2005-t491-12910559.pdf?src-supplier=Mouser, ComponentLink8URL=https://datasheet.ciiva.com/12910/kem-t2005-t491-12910559.pdf?src-supplier=Mouser, ComponentLink9Description="Link Digikey", ComponentLink9URL=https://www.digikey.com/en/products/detail/kemet/T491A106M010AT/818547, Construction=Flat, Depth=1.6mm, Designer=TVBac, Dissipation Factor=6%, Features="General Purpose", Height=1.6mm, Lead Free="Lead Free", Lead Pitch=1.2mm, Length=3.2mm, Mounting Technology="Surface Mount,PCB", Packaging="Tape and Reel", Pins=2, Polarity=Polar, Pricing="1=0.29, 10=0.152, 50=0.152, 100=0.098, 1000=0.083, 2000=0.076, 10000=0.071, 50000=0.069 (USD)", Reach SVHC Compliant=No, RoHS=Yes, RoHS Compliant=Yes, Series=T491, Size=1.6mm, Stock=78299, Supplier=Mouser, Termination=SMD/SMT, Voltage Rating=10V, Voltage Rating (DC)=10V, Weight=0.000571oz, Width=1.6mm
C10 C11 C12 C13 C16 C18: library part "CAP; 0.033uF; 33nF; 0603; 16V; C0603C333J4REC7411", "Multilayer Ceramic Capacitors MLCC - SMD/SMT 16V 0.033uF X7R 0603 5%", Manufacturer=KEMET, Manufacturer Part Number=C0603C333J4REC7411, Supplier Part Number=80-C0603C333J4RECLR, Category="Ceramic Capacitors", ComponentLink1Description=https://api.kemet.com/component-edge/download/datasheet/C0603C333J4REC7411.pdf?src-supplier=Digikey, ComponentLink1URL=https://api.kemet.com/component-edge/download/datasheet/C0603C333J4REC7411.pdf?src-supplier=Digikey, ComponentLink2Description="Link Digikey", ComponentLink2URL=https://www.digikey.com/en/products/detail/kemet/C0603C333J4REC7411/8645086, Designer=TVBac, Pricing="1=0.13, 10=0.057, 50=0.057, 100=0.033, 1000=0.025, 2500=0.022, 10000=0.02, 15000=0.018, 45000=0.017, 90000=0.014 (USD)", RoHS=Yes, Stock=17910, Supplier=Mouser
C14 C15: library part "CAP; 22pF; 50V; SMD; CC0603FRNPO9BN220", "Multilayer Ceramic Capacitor, 22 pF, 50 V, ï¿½ 1%, C0G (NP0), 0603 [1608 Metric]", Manufacturer=Yageo, Manufacturer Part Number=CC0603FRNPO9BN220, Supplier Part Number=1000074, Category="Ceramic Capacitors", ComponentLink1Description=https://datasheet.ciiva.com/13211/upy-gp-np0-16v-to-50v-8-13211061.pdf?src-supplier=Mouser, ComponentLink1URL=https://datasheet.ciiva.com/13211/upy-gp-np0-16v-to-50v-8-13211061.pdf?src-supplier=Mouser, ComponentLink2Description="Link Digikey", ComponentLink2URL=https://www.digikey.com/en/products/detail/yageo/CC0603FRNPO9BN220/5883497, Designer=TVBac, Halogen Free=5694HalogenFree, Lead Free=5697LeadFree, Pricing="4000=0.0159, 12000=0.0156, 20000=0.0154, 80000=0.0149, 120000=0.0147 (USD)", RoHS=Yes, Stock=144000, Supplier="Future Electronics"
C20: library part "CAP; 10uF; 10V; 0805; C0805C106K9PACTU", "Multilayer Ceramic Capacitor, 10 uF, 6.3 V, ï¿½ 10%, X5R, 0805 [2012 Metric]", Case Code (Imperial)=0805, Case Code (Metric)=2012, Dielectric=X5R, Dielectric Material=4241ConductorMaterial, Manufacturer=KEMET, Manufacturer Part Number=C0805C106K9PACTU, Max Operating Temperature=85°C, Min Operating Temperature=-55°C, Package Quantity=3000, Supplier Part Number=80-C0805C106K9P, Tolerance=10%, Voltage Rating=6.3V, Case/Package=0805, Category="Ceramic Capacitors", ComponentLink1Description=https://datasheet.ciiva.com/7842/kem-c1006-x5r-smd-7842200.pdf?src-supplier=Element14, ComponentLink1URL=https://datasheet.ciiva.com/7842/kem-c1006-x5r-smd-7842200.pdf?src-supplier=Element14, ComponentLink2Description=https://datasheet.ciiva.com/7842/kem-c1006-x5r-smd-7842201.pdf?src-supplier=Element14, ComponentLink2URL=https://datasheet.ciiva.com/7842/kem-c1006-x5r-smd-7842201.pdf?src-supplier=Element14, ComponentLink3Description=https://datasheet.ciiva.com/18193/getdatasheetpartid-320652-18193500.pdf?src-supplier=Verical, ComponentLink3URL=https://datasheet.ciiva.com/18193/getdatasheetpartid-320652-18193500.pdf?src-supplier=Verical, ComponentLink4Description="Link Digikey", ComponentLink4URL=https://www.digikey.com/en/products/detail/kemet/C0805C106K9PAC7800/551604, Construction=Flat, Contact Material=Tin, Depth=1.25mm, Designer=TVBac, Dissipation Factor=5%, Height=1.25mm, Lead Free=5697LeadFree, Lead Pitch=0.75mm, Length=2mm, Material=4241ConductorMaterial, Mounting Technology="Surface Mount", Packaging="Tape and Reel", Pins=2, Pricing="1=0.12, 10=0.074, 50=0.074, 100=0.044, 1000=0.033, 3000=0.026, 9000=0.025, 10000=0.025, 24000=0.023, 45000=0.022, 99000=0.019 (USD)", Radiation Hardening=No, Reach SVHC Compliant=No, RoHS=Yes, RoHS Compliant=Yes, Series="SMD Comm X5R", Stock=133022, Supplier=Mouser, Termination=SMD/SMT, Voltage Rating (AC)=6.3V, Voltage Rating (DC)=6.3V, Width=1.2mm
D1: library part "LED; RGB; WS2812; COM-16347", "Address Led Red/grn/blue", Manufacturer=SparkFun, Manufacturer Part Number=COM-16347, Supplier Part Number=1568-COM-16347CT-ND, Category=Optoelectronics, ComponentLink1Description=http://cdn.sparkfun.com/datasheets/BreakoutBoards/WS2812B.pdf?src-supplier=Digikey, ComponentLink1URL=http://cdn.sparkfun.com/datasheets/BreakoutBoards/WS2812B.pdf?src-supplier=Digikey, ComponentLink2Description="Link Digikey", ComponentLink2URL=https://www.digikey.com/en/products/detail/sparkfun-electronics/COM-16347/11630204, Designer=TVBac, Pricing="1=0.6 (USD)", RoHS=No, Stock=32070, Supplier=Digikey
D2 D3: library part "DIODE; SMD; 1N4007FLN4007;", "Diode Gen Purp 1KV 1A SOD123FL", Forward Current=1A, Manufacturer="Sangdest Microelectronics", Manufacturer Part Number=1N4007FL, Max Forward Surge Current (Ifsm)=30A, Max Operating Temperature=150°C, Max Repetitive Reverse Voltage (Vrrm)=1kV, Max Reverse Current=5uA, Min Operating Temperature=-55°C, Supplier Part Number=1655-1N4007FLCT-ND, Category=Diodes, ComponentLink1Description="Link Digikey", ComponentLink1URL=https://www.digikey.com/en/products/detail/smc-diode-solutions/1N4007FL/11657817, Designer=TVBac, Height=1.1mm, Pricing="1=0.1, 10=0.058, 100=0.039, 500=0.02954, 1000=0.02627 (USD)", Reverse Voltage=1kV, RoHS=No, Stock=332632, Supplier=Digikey
IC1: library part "OPAM; SMD; LM324DR", "Quad 30-V 1.2-MHz operational amplifier 14-SOIC 0 to 70", Case/Package=SOIC, Input Bias Current=250nA, Input Offset Voltage (Vos)=7mV, Manufacturer="Texas Instruments", Manufacturer Part Number=LM324DR, Max Dual Supply Voltage=16V, Max Operating Temperature=70°C, Max Supply Voltage=32V, Min Dual Supply Voltage=1.5V, Min Operating Temperature=0°C, Min Supply Voltage=3V, Operating Supply Current=1.4mA, Output Current=30mA, Output Current per Channel=40mA, Package Quantity=2500, Supplier Part Number=296-14597-1-ND, Supply Current=3mA, Voltage Gain=100dB, Amplifier Type="GENERAL PURPOSE", Bandwidth=1.2MHz, Category="Amplifiers - Op Amps, Buffer, Instrumentation", Common Mode Rejection Ratio=65dB, ComponentLink1Description=https://datasheet.ciiva.com/34301/902590-34301708.pdf?src-supplier=Jameco, ComponentLink1URL=https://datasheet.ciiva.com/34301/902590-34301708.pdf?src-supplier=Jameco, ComponentLink2Description=https://datasheet.ciiva.com/1795/lm224-1795532.pdf?src-supplier=Digikey, ComponentLink2URL=https://datasheet.ciiva.com/1795/lm224-1795532.pdf?src-supplier=Digikey, ComponentLink3Description=https://datasheet.ciiva.com/1795/lm224-1795533.pdf?src-supplier=Digikey, ComponentLink3URL=https://datasheet.ciiva.com/1795/lm224-1795533.pdf?src-supplier=Digikey, ComponentLink4Description=https://datasheet.ciiva.com/1795/lm224-1795534.pdf?src-supplier=Digikey, ComponentLink4URL=https://datasheet.ciiva.com/1795/lm224-1795534.pdf?src-supplier=Digikey, ComponentLink5Description=https://datasheet.ciiva.com/5997/1768103-5997421.pdf?src-supplier=Farnell, ComponentLink5URL=https://datasheet.ciiva.com/5997/1768103-5997421.pdf?src-supplier=Farnell, ComponentLink6Description=https://datasheet.ciiva.com/2973/lm324ka-2973348.pdf?src-supplier=Avnet, ComponentLink6URL=https://datasheet.ciiva.com/2973/lm324ka-2973348.pdf?src-supplier=Avnet, ComponentLink7Description=https://datasheet.ciiva.com/7709/1840878-7709814.pdf?src-supplier=Element14, ComponentLink7URL=https://datasheet.ciiva.com/7709/1840878-7709814.pdf?src-supplier=Element14, ComponentLink8Description=https://datasheet.ciiva.com/46385/1877076-46385751.pdf?src-supplier=Element14, ComponentLink8URL=https://datasheet.ciiva.com/46385/1877076-46385751.pdf?src-supplier=Element14, ComponentLink9Description="Link Digikey", ComponentLink9URL=https://www.digikey.kr/en/products/detail/texas-instruments/LM324DR/555719, Designer=TVBac, Gain Bandwidth Product=1.2MHz, Lead Free="Lead Free", Mounting Technology="Surface Mount", Number of Amplifiers=4, Number of Channels=4, Number of Circuits=4, Number of Elements=4, Operating Supply Voltage=16V, Packaging="Tape and Reel", Pins=14, Pricing="1=0.23, 10=0.152, 25=0.132, 100=0.1105, 250=0.10008, 500=0.09382, 1000=0.08867, 2500=0.08322, 5000=0.07994, 7500=0.0783, 12500=0.07647, 17500=0.07541, 25000=0.07438, 62500=0.07218, 125000=0.07085 (USD)", Radiation Hardening=No, Reach SVHC Compliant=No, RoHS=Yes, RoHS Compliant=Yes, Series=-, Slew Rate=0.5V/µs, Stock=58799, Supplier=Digikey, Technology=BIPOLAR, Thickness=1.58mm, Unity Gain Bandwidth Product=1.2MHz
IC2: library part "LDO; 3V3; 1A; SMD; AZ1117EH-3.3TRG1", "Linear Voltage Regulator IC 1 Output 1A SOT-223", Package="SOT-223 Diodes Inc.", Availability=Unavailable, ComponentLink1Description="Link Digikey", ComponentLink1URL=https://www.digikey.com/en/products/detail/diodes-incorporated/AZ1117EH-3-3TRG1/5001329, Designer=TVBac, MF="Diodes Inc.", MP=AZ1117EH-3.3TRG1, Price=None, SnapEDA_Link=https://www.snapeda.com/parts/AZ1117EH-3.3TRG1/Diodes%20Inc./view-part/482930/?ref=snap
IC3: library part ADE7753ARSZ, "Single Phase Multifunction Metering IC 20-Pin SSOP Tube", Manufacturer="Analog Devices", Supplier Part Number=584-ADE7753ARSZ, Category="Analog to Digital Converters (ADCs)", ComponentLink1Description=https://datasheet.ciiva.com/15373/ade7753-249340-15373717.pdf?src-supplier=Mouser, ComponentLink1URL=https://datasheet.ciiva.com/15373/ade7753-249340-15373717.pdf?src-supplier=Mouser, ComponentLink2Description=https://datasheet.ciiva.com/1166/1610806-1166771.pdf?src-supplier=Element14, ComponentLink2URL=https://datasheet.ciiva.com/1166/1610806-1166771.pdf?src-supplier=Element14, ComponentLink3Description=https://datasheet.ciiva.com/15134/getdatasheetpartid-132040-15134272.pdf?src-supplier=Verical, ComponentLink3URL=https://datasheet.ciiva.com/15134/getdatasheetpartid-132040-15134272.pdf?src-supplier=Verical, ComponentLink4Description=https://datasheet.ciiva.com/1941/ade7753-1941429.pdf?src-supplier=Digikey, ComponentLink4URL=https://datasheet.ciiva.com/1941/ade7753-1941429.pdf?src-supplier=Digikey, ComponentLink5Description=https://datasheet.ciiva.com/22621/1610806-22621637.pdf?src-supplier=Element14, ComponentLink5URL=https://datasheet.ciiva.com/22621/1610806-22621637.pdf?src-supplier=Element14, ComponentLink6Description=https://datasheet.ciiva.com/3148/ade7753-3148700.pdf?src-supplier=Avnet, ComponentLink6URL=https://datasheet.ciiva.com/3148/ade7753-3148700.pdf?src-supplier=Avnet, ComponentLink7Description=https://datasheet.ciiva.com/1168/1610806-1168083.pdf?src-supplier=Element14, ComponentLink7URL=https://datasheet.ciiva.com/1168/1610806-1168083.pdf?src-supplier=Element14, ComponentLink8Description=https://datasheet.ciiva.com/5697/ade7753-5697029.pdf?src-supplier=Farnell, ComponentLink8URL=https://datasheet.ciiva.com/5697/ade7753-5697029.pdf?src-supplier=Farnell, ComponentLink9Description=https://datasheet.ciiva.com/48694/001249930-da-01-en-ic-energy-meteri-ade7753arsz-ssop-20-adi-48694326.pdf?src-supplier=Conrad, ComponentLink9URL=https://datasheet.ciiva.com/48694/001249930-da-01-en-ic-energy-meteri-ade7753arsz-ssop-20-adi-48694326.pdf?src-supplier=Conrad, ComponentLink10Description="Link Digikey", ComponentLink10URL=https://www.digikey.com/en/products/detail/analog-devices-inc/ADE7753ARSZ/671181, Designer=TVBac, Manufacturer Part Number=ADE7753ARSZ, Pricing="1=7.3, 10=5.71, 50=5.04, 100=3.91, 1000=3.51, 10000=3.37 (USD)", RoHS=Yes, Stock=239, Supplier=Mouser
J1: library part "HEADER; 4PIN; 1.27; VER; TMS-104-02-G-S", "Conn Unshrouded Header HDR 4 POS 1.27mm Solder ST Top Entry Thru-Hole Bulk", Flammability Rating="UL94 V-0", Insulation Color=Black, Manufacturer=Samtec, Manufacturer Part Number=TMS-104-02-G-S, Max Operating Temperature=125°C, Min Operating Temperature=-55°C, Category=Connectors, ComponentLink1Description=http://www.farnell.com/datasheets/1992060.pdf?_ga=2.199389226.569325269.1503285096-1413671594.1503025027&src-supplier=Farnell, ComponentLink1URL=http://www.farnell.com/datasheets/1992060.pdf?_ga=2.199389226.569325269.1503285096-1413671594.1503025027&src-supplier=Farnell, ComponentLink2Description=http://www.samtec.com/documents/webfiles/pdf/HTMS_TH.PDF?src-supplier=Avnet, ComponentLink2URL=http://www.samtec.com/documents/webfiles/pdf/HTMS_TH.PDF?src-supplier=Avnet, ComponentLink3Description=http://suddendocs.samtec.com/prints/tms-1xx-xx-xx-x-xx-xxx-mkt.pdf?src-supplier=Digikey, ComponentLink3URL=http://suddendocs.samtec.com/prints/tms-1xx-xx-xx-x-xx-xxx-mkt.pdf?src-supplier=Digikey, ComponentLink4Description="Link Digikey", ComponentLink4URL=https://www.digikey.com/en/products/detail/samtec-inc/TMS-104-02-G-S/6691742, Connector Type=Header, Contact Finish - Mating=GOLD, Contact Material=Bronze, Contact Plating=Gold, Contact Shape=Square, Contact Type="Male Pin", Designer=TVBac, Fastening Type=Pull, Gender=Male, Insulation Material=Polymer, Mounting Technology="Through Hole", Number of Contacts=4, Number of Positions=4, Number of Rows=1, Packaging=Bulk, Pitch=1.27mm, Pricing="1=0.7301, 10=0.63668, 30=0.63341, 50=0.63015, 100=0.48 (USD)", Radiation Hardening=No, Reach SVHC Compliant=No, RoHS=Yes, RoHS Compliant=Yes, Series=TMS, Stock=309, Supplier=Avnet, Supplier Part Number=TMS-104-02-G-S, System=Connector, Termination=Solder
M1: library part "ESP32-WROOM-WROVE-32E-H4; SMD;", "Rf Txrx Module Bt Trace Ant SMD", Manufacturer="Espressif Systems", Manufacturer Part Number=ESP32-WROOM-32E-H4, Supplier Part Number=1965-ESP32-WROOM-32E-H4CT-ND, Category=LDO, ComponentLink1Description="Link Datasheet", ComponentLink1URL=https://www.espressif.com/sites/default/files/documentation/esp32-wroom-32e_esp32-wroom-32ue_datasheet_en.pdf, ComponentLink2Description="Link Digikey", ComponentLink2URL=https://www.digikey.com/en/products/detail/espressif-systems/ESP32-WROOM-32E-H4/12696413, Designer=TVBac, Pricing="1=2.68 (USD)", RoHS=No, Stock=7552, Supplier=Digikey
R1 R2 R3 R4 R6 R7 R8 R11 R32: library part "RES; 10K; 0603; SMD; ESR03EZPF1002", "SMD Chip Resistor, 10 kOhm, ± 1%, 250 mW, 0603 [1608 Metric], Thick Film, Anti-Surge", Case Code (Imperial)=0603, Case Code (Metric)=1608, Manufacturer=Rohm, Manufacturer Part Number=ESR03EZPF1002, Max Operating Temperature=155°C, Max Power Dissipation=250mW, Min Operating Temperature=-55°C, Package Quantity=1, Ratings=AEC-Q200, Supplier Part Number=RHM10KADCT-ND, Temperature Coefficient=100ppm/°C, Tolerance=1%, Voltage Rating (DC)=150V, Case/Package=0603, Category="Chip SMD Resistors", ComponentLink1Description=https://datasheet.ciiva.com/2469/esr-2469710.pdf?src-supplier=Digikey, ComponentLink1URL=https://datasheet.ciiva.com/2469/esr-2469710.pdf?src-supplier=Digikey, ComponentLink2Description=https://datasheet.ciiva.com/2469/esr-2469711.pdf?src-supplier=Digikey, ComponentLink2URL=https://datasheet.ciiva.com/2469/esr-2469711.pdf?src-supplier=Digikey, ComponentLink3Description=https://datasheet.ciiva.com/2469/esr-2469709.pdf?src-supplier=Digikey, ComponentLink3URL=https://datasheet.ciiva.com/2469/esr-2469709.pdf?src-supplier=Digikey, ComponentLink4Description="Link Digikey", ComponentLink4URL=https://www.digikey.com/en/products/detail/rohm-semiconductor/ESR03EZPF1002/1983429, Designer=TVBac, Features="Automotive AEC-Q200", Height=0.022inch, Lead Free=5697LeadFree, Length=0.063inch, Number of Terminations=2, Packaging="Cut Tape", Power Rating=250mW, Pricing="1=0.16, 10=0.078, 50=0.0516, 100=0.044, 500=0.03138, 1000=0.02764 (USD)", RoHS=Yes, RoHS Compliant=Yes, Series=ESR, Stock=2136779, Supplier=Digikey, Width=0.031inch
  R4: Package=0603
R9 R12 R13 R16 R17 R18 R20: library part "RES; 100R; 0603; SMD; KTR03EZPF1000", "Res Thick Film 0603 100 Ohm 1% 0.1W(1/10W) ±100ppm/C Pad SMD T/R Automotive AEC-Q200", Case Code (Imperial)=0603, Case Code (Metric)=1608, Manufacturer=Rohm, Manufacturer Part Number=KTR03EZPF1000, Max Operating Temperature=155°C, Max Power Dissipation=100mW, Min Operating Temperature=-55°C, Ratings=AEC-Q200, Supplier Part Number=755-KTR03EZPF1000, Temperature Coefficient=100ppm/°C, Tolerance=1%, Voltage Rating=350V, Case/Package=0603, Category="Chip SMD Resistors", ComponentLink1Description=https://datasheet.ciiva.com/14926/ktr-14926472.pdf?src-supplier=Digikey, ComponentLink1URL=https://datasheet.ciiva.com/14926/ktr-14926472.pdf?src-supplier=Digikey, ComponentLink2Description=https://datasheet.ciiva.com/14932/ktr-14932133.pdf?src-supplier=Digikey, ComponentLink2URL=https://datasheet.ciiva.com/14932/ktr-14932133.pdf?src-supplier=Digikey, ComponentLink3Description="Link Digikey", ComponentLink3URL=https://www.digikey.com/en/products/detail/rohm-semiconductor/KTR03EZPF1000/4051558, Designer=TVBac, Features="Automotive AEC-Q200", Number of Terminations=2, Packaging="Cut Tape", Pricing="1=0.12, 10=0.039, 50=0.039, 100=0.024, 1000=0.021, 10000=0.015 (USD)", RoHS=Yes, RoHS Compliant=Yes, Series=KTR, Stock=66325, Supplier=Mouser, Voltage Rating (DC)=350V
R10 R14 R19 R23 R28 R30 R31 R33 R36 R37 R38 R39 R42 R43: library part "RES; 1K; 0603; SMD; ESR03EZPF1001", "SMD Chip Resistor, 1 kOhm, ± 1%, 250 mW, 0603 [1608 Metric], Thick Film, Anti-Surge", Manufacturer=Rohm, Manufacturer Part Number=ESR03EZPF1001, Supplier Part Number=RHM1.00KADCT-ND, Voltage Rating=150V, Category="Chip SMD Resistors", ComponentLink1Description=https://datasheet.ciiva.com/2469/esr-2469712.pdf?src-supplier=Digikey, ComponentLink1URL=https://datasheet.ciiva.com/2469/esr-2469712.pdf?src-supplier=Digikey, ComponentLink2Description=https://datasheet.ciiva.com/2469/esr-2469713.pdf?src-supplier=Digikey, ComponentLink2URL=https://datasheet.ciiva.com/2469/esr-2469713.pdf?src-supplier=Digikey, ComponentLink3Description=https://datasheet.ciiva.com/2469/esr-2469714.pdf?src-supplier=Digikey, ComponentLink3URL=https://datasheet.ciiva.com/2469/esr-2469714.pdf?src-supplier=Digikey, ComponentLink4Description="Link Digikey", ComponentLink4URL=https://www.digikey.com/en/products/detail/rohm-semiconductor/ESR03EZPF1001/1983428, Designer=TVBac, Lead Free=5697LeadFree, Pricing="1=0.11, 10=0.055, 50=0.0364, 100=0.0309, 500=0.02206, 1000=0.01943 (USD)", RoHS=Yes, Stock=2703233, Supplier=Digikey, Voltage Rating (DC)=150V
R15 R21 R22: library part "RES; 4.7K; 0603; SMD; SFR03EZPF4701", "Res Anti-Sulfured Thick Film 0603 4.7k Ohm 1% 1/10W ±100ppm/°C Molded Paper T/R", Manufacturer=Rohm, Manufacturer Part Number=SFR03EZPF4701, Power Rating=100mW, Supplier Part Number=755-SFR03EZPF4701, Voltage Rating (DC)=50V, Category="Chip SMD Resistors", ComponentLink1Description=http://www.farnell.com/datasheets/2611943.pdf?src-supplier=Farnell, ComponentLink1URL=http://www.farnell.com/datasheets/2611943.pdf?src-supplier=Farnell, ComponentLink2Description=http://www.farnell.com/datasheets/2611943.pdf?src-supplier=Newark, ComponentLink2URL=http://www.farnell.com/datasheets/2611943.pdf?src-supplier=Newark, ComponentLink3Description=http://www.farnell.com/datasheets/2611943.pdf?src-supplier=Element14, ComponentLink3URL=http://www.farnell.com/datasheets/2611943.pdf?src-supplier=Element14, ComponentLink4Description=https://www.rohm.com/datasheet/SFR03EZPF/sfr-e?src-supplier=Digikey, ComponentLink4URL=https://www.rohm.com/datasheet/SFR03EZPF/sfr-e?src-supplier=Digikey, ComponentLink5Description="Link Digikey", ComponentLink5URL=https://www.digikey.com/en/products/detail/rohm-semiconductor/SFR03EZPF4701/9771855, Designer=TVBac, Pricing="1=0.14, 10=0.045, 50=0.045, 100=0.027, 1000=0.02, 10000=0.014 (USD)", RoHS=Yes, Stock=30180, Supplier=Mouser
R29 R34 R40 R41 R44: library part "RES; 100K; 0603; SMD; ESR03EZPJ104", "Res Thick Film 0603 100K Ohm 5% 0.25W(1/4W) ±200ppm/C Pad SMD Automotive T/R", Manufacturer=Rohm, Manufacturer Part Number=ESR03EZPJ104, Supplier Part Number=RHM100KDCT-ND, Voltage Rating=150V, Category="Chip SMD Resistors", ComponentLink1Description=https://datasheet.ciiva.com/14924/esr-14924811.pdf?src-supplier=Digikey, ComponentLink1URL=https://datasheet.ciiva.com/14924/esr-14924811.pdf?src-supplier=Digikey, ComponentLink2Description=https://datasheet.ciiva.com/14928/esr-14928813.pdf?src-supplier=Digikey, ComponentLink2URL=https://datasheet.ciiva.com/14928/esr-14928813.pdf?src-supplier=Digikey, ComponentLink3Description=https://datasheet.ciiva.com/14930/esr-14930633.pdf?src-supplier=Digikey, ComponentLink3URL=https://datasheet.ciiva.com/14930/esr-14930633.pdf?src-supplier=Digikey, ComponentLink4Description="Link Digikey", ComponentLink4URL=https://www.digikey.com/en/products/detail/rohm-semiconductor/ESR03EZPJ104/4051180, Designer=TVBac, Lead Free=5697LeadFree, Pricing="1=0.1, 10=0.048, 50=0.0312, 100=0.0265, 500=0.0188, 1000=0.0165 (USD)", RoHS=Yes, Stock=165361, Supplier=Digikey, Voltage Rating (DC)=150V
SW1 SW2: library part "BUT; SW; SMD; EVQ-P7L01P", "Tactile Switch SPST-NO Side Actuated Surface Mount, Right Angle", Package=None, Check_prices=https://www.snapeda.com/parts/EVQ-P7L01P/Panasonic+Electronic+Components/view-part/?ref=eda, Digi-Key_Part_Number=P16769TR-ND, MF="Panasonic Electronic Components", MP=EVQ-P7L01P, Purchase-URL=https://pricing.snapeda.com/search/part/EVQ-P7L01P/?ref=eda, SnapEDA_Link=https://www.snapeda.com/parts/EVQ-P7L01P/Panasonic+Electronic+Components/view-part/?ref=snap